# Altium PCB Solar Battery Charger PCB.PcbDoc (part 1 of 2)
Units mm, origin at the board's own origin, x right, y up, seen from the top; angles counter-clockwise.
Board outline 113.77 x 60.65 mm, 4 copper layers (Top Layer, Int1 (GND), Int2 (PWR), Bottom Layer), stack 1.586 mm thick; 88 components, 58 nets, 240 pads, 94 vias.
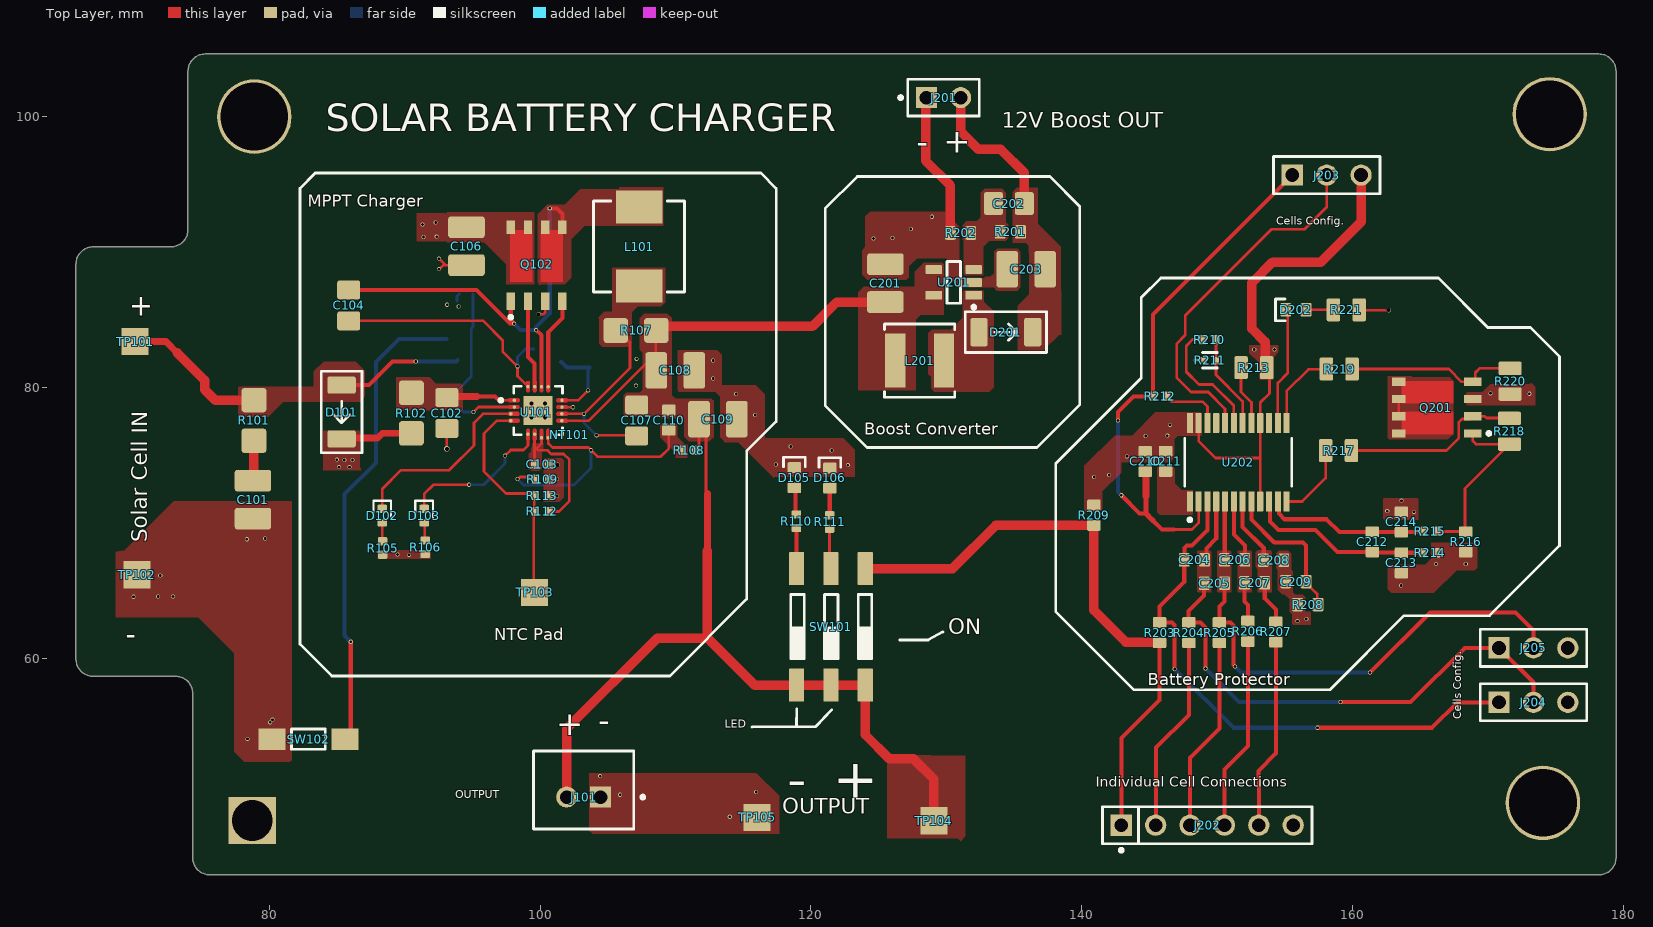
[diagram p0: Top Layer view]
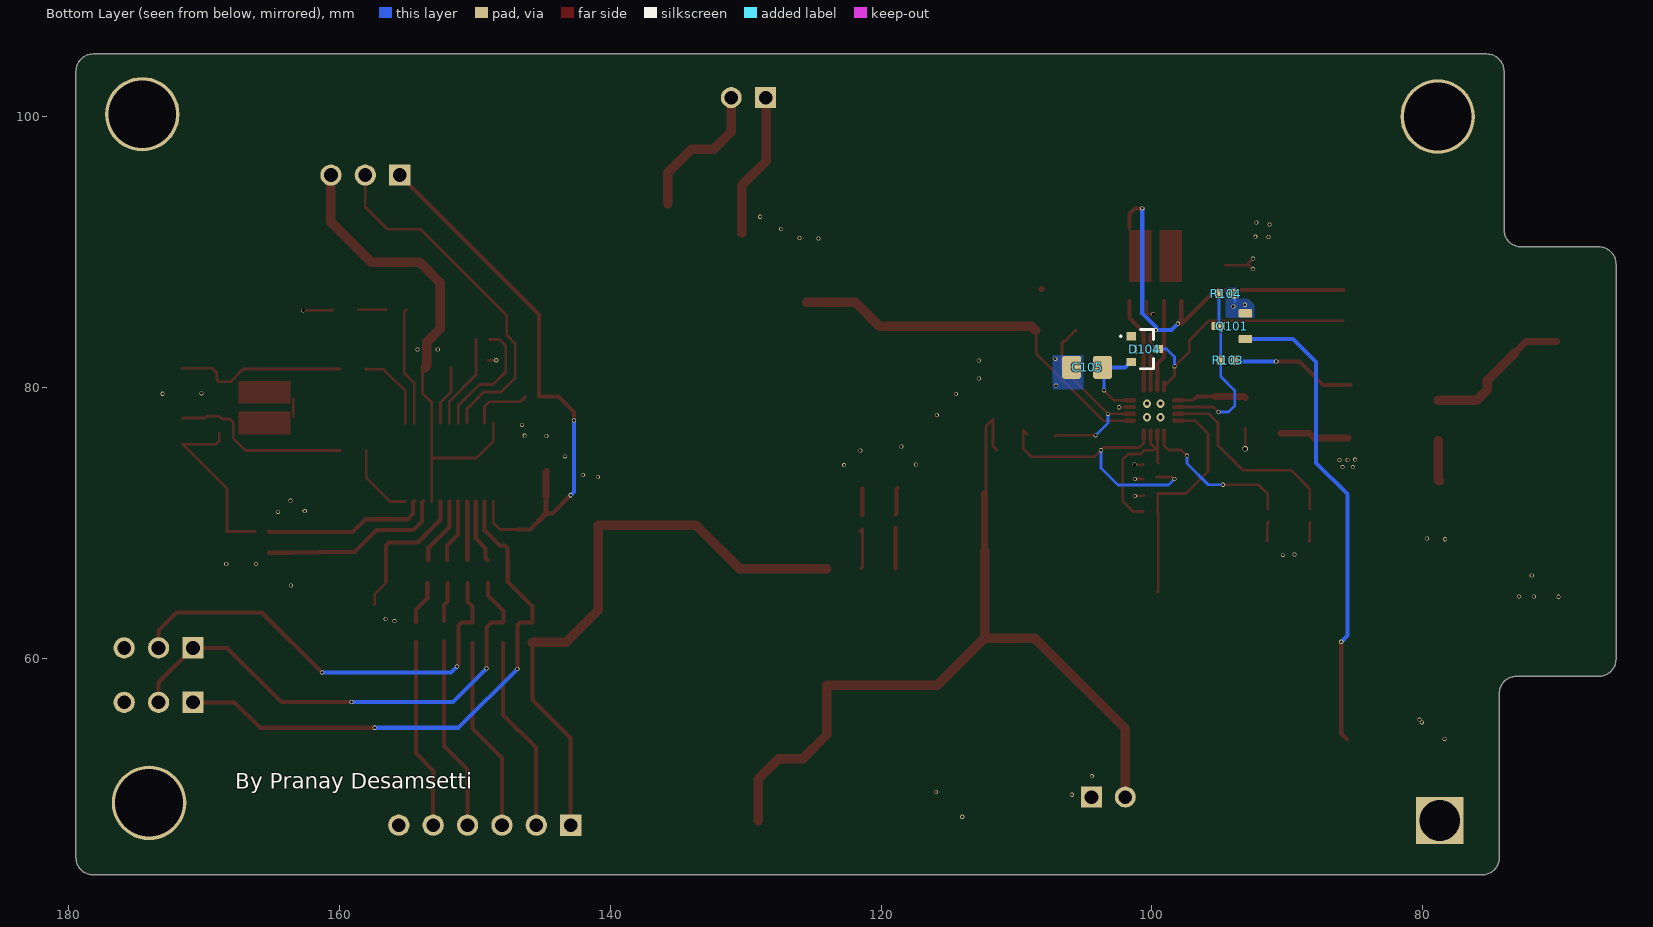
[diagram p1: Bottom Layer view, seen from below]
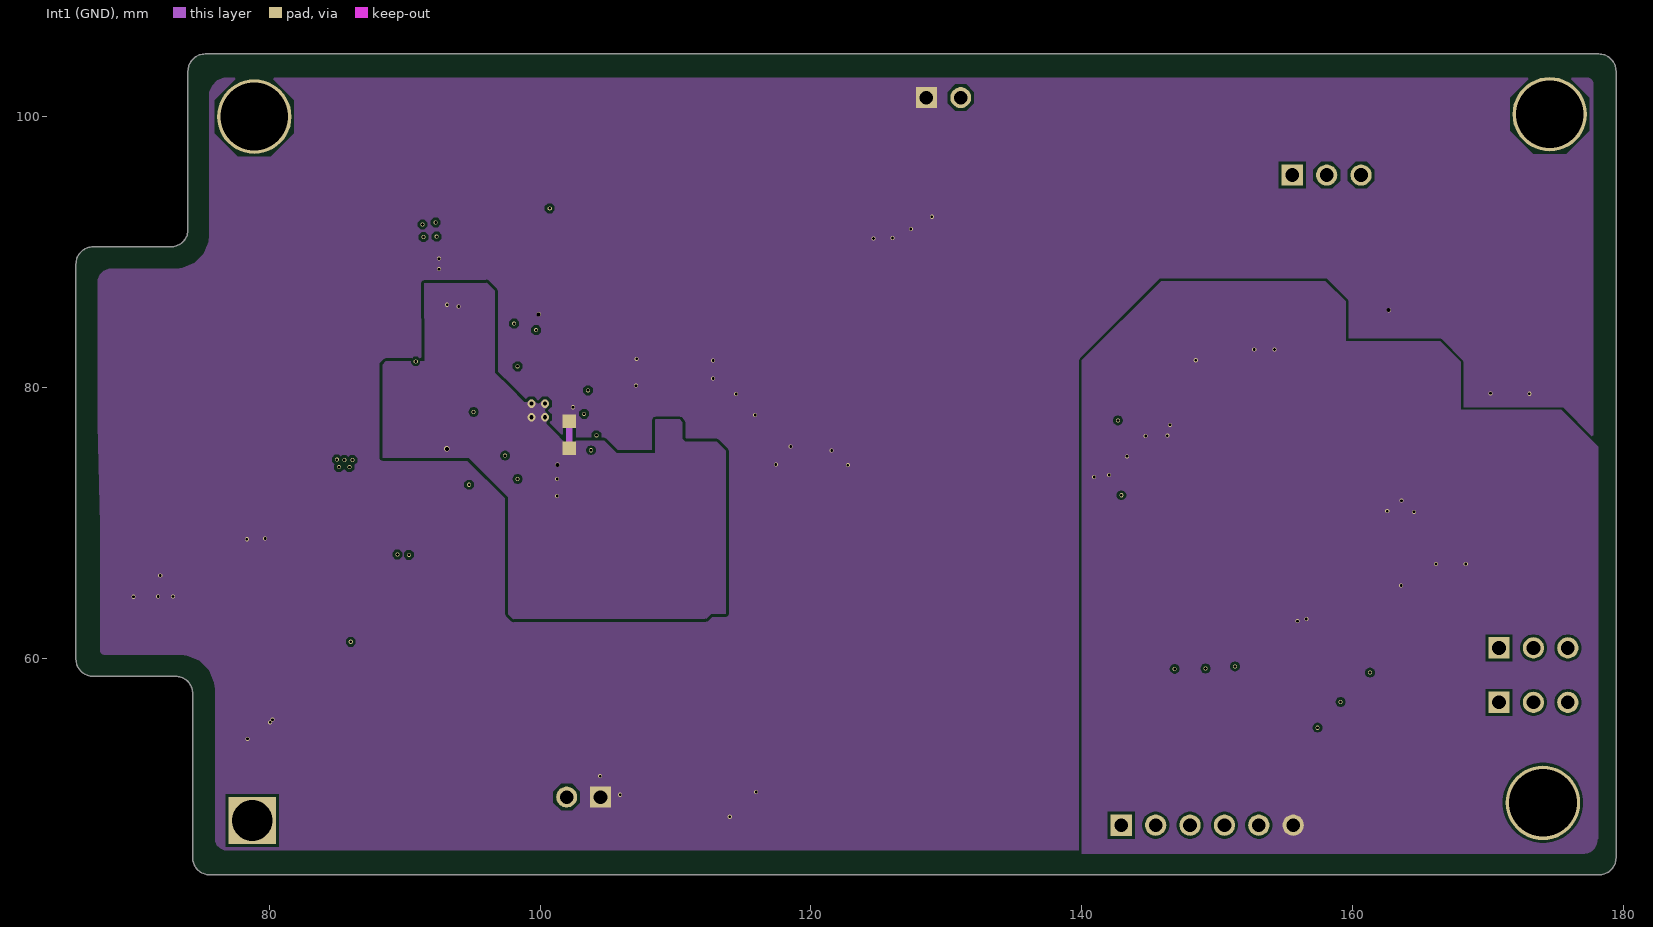
[diagram p2: Int1 (GND)]
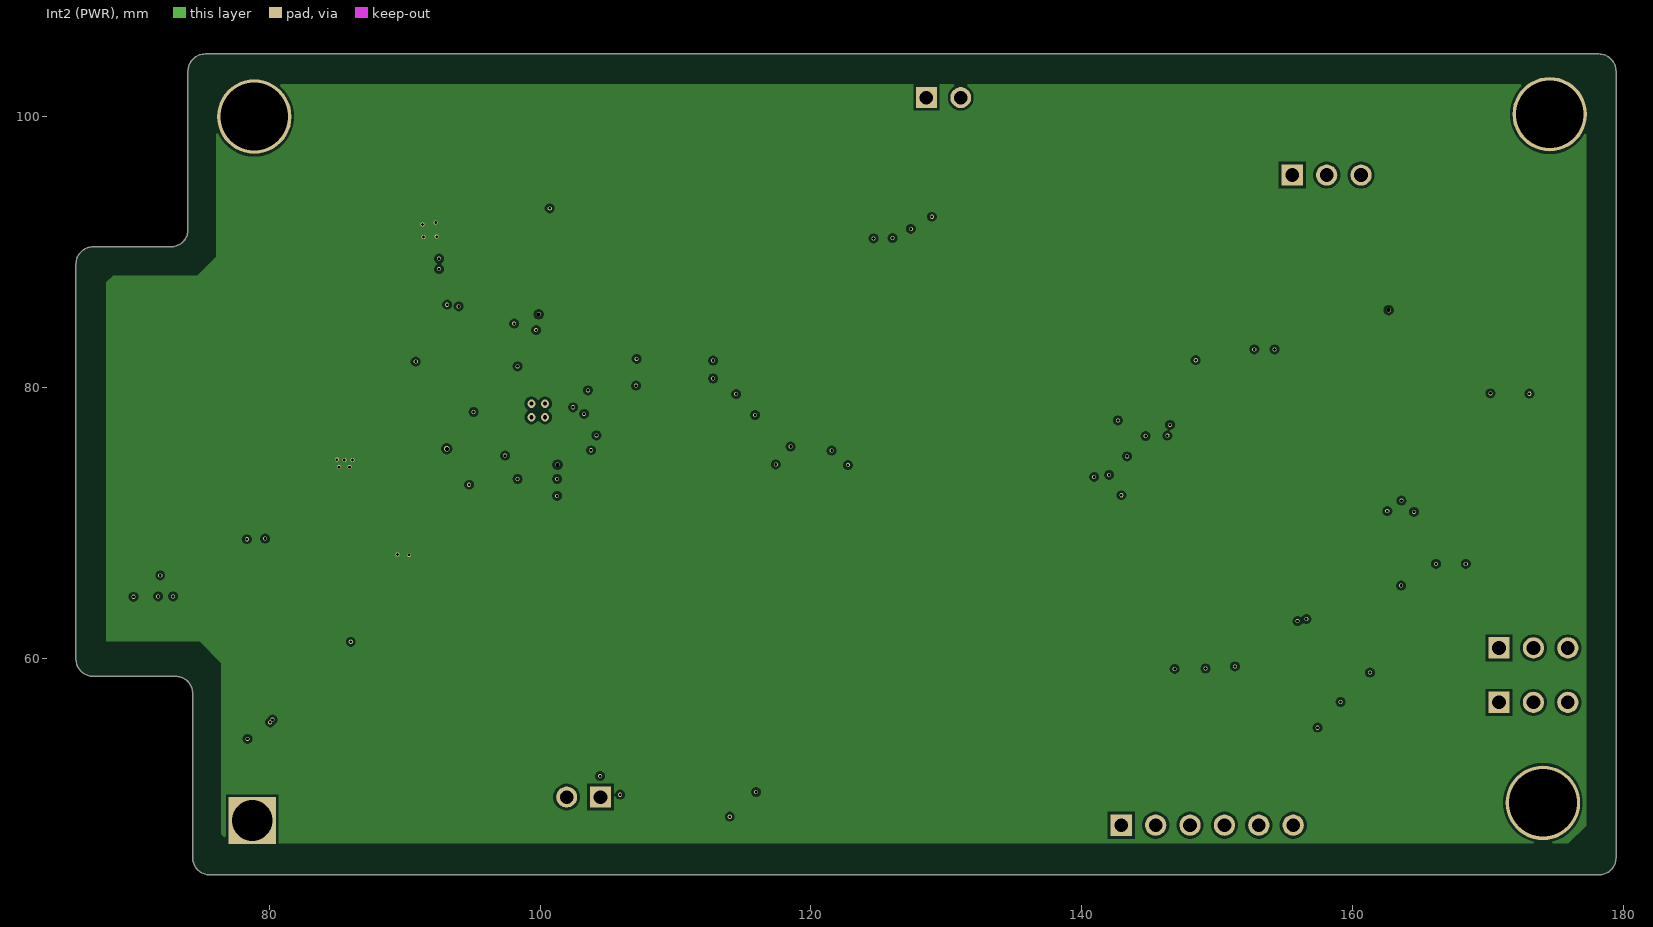
[diagram p3: Int2 (PWR)]
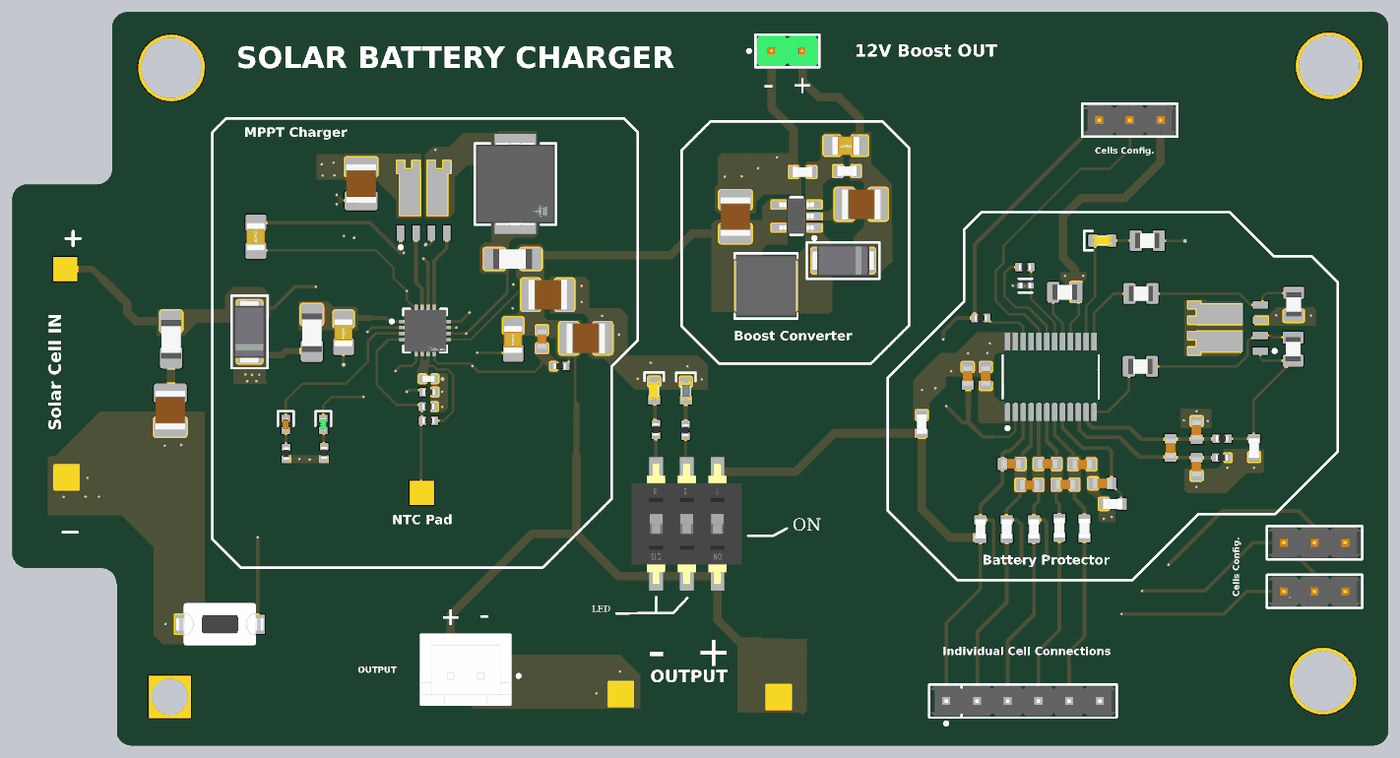
[diagram p4: 3D render of the assembled board from above, using the file's embedded part models]
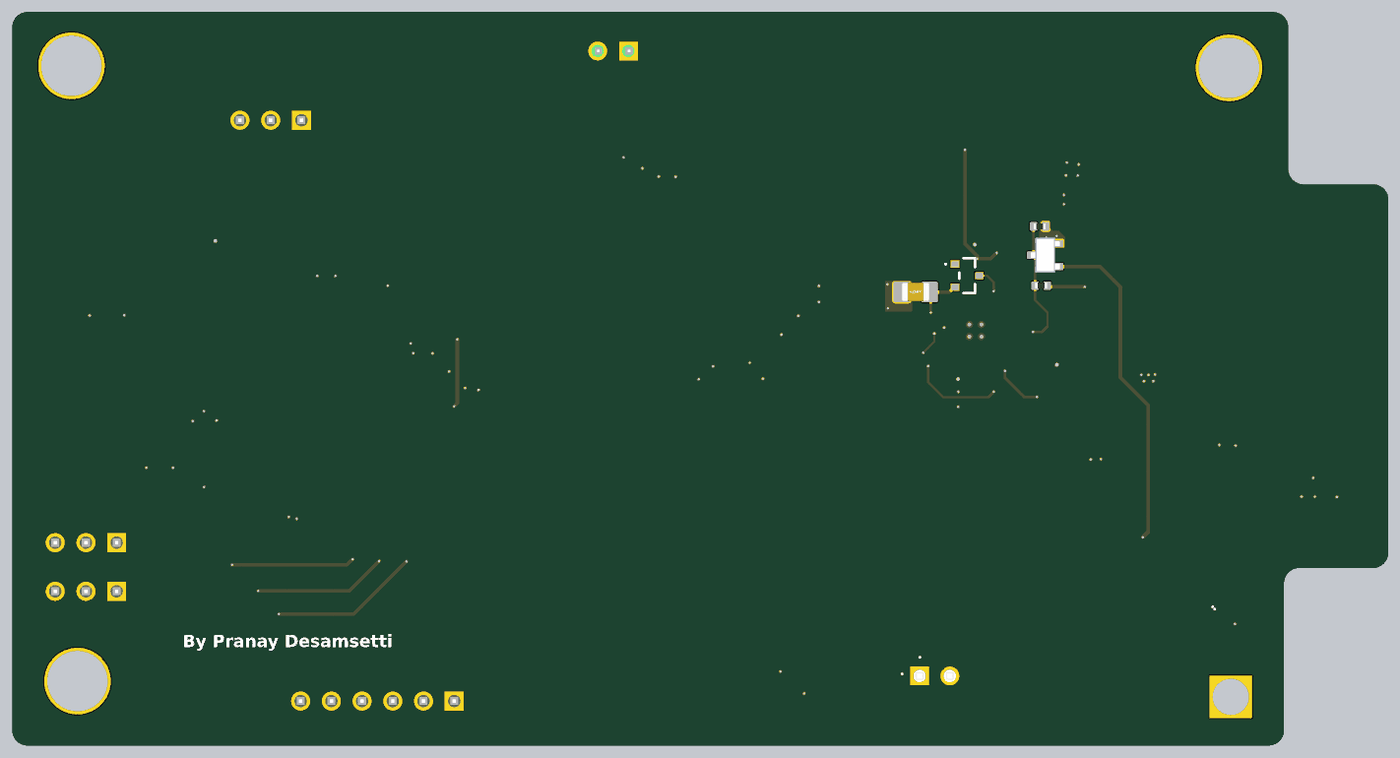
[diagram p5: 3D render of the assembled board from below, using the file's embedded part models]

## Layer stack, top to bottom
Top Solder: solder mask 0.0254, SM-001, Dk 4
Top Layer: signal copper 0.035
Dielectric 2: prepreg 0.2104, PP-017, Dk 4.4
Int1 (GND): signal copper 0.0152
Dielectric 3: core 1.065, Core-039, Dk 4.6
Int2 (PWR): signal copper 0.0152
Dielectric 4: prepreg 0.2104, PP-017, Dk 4.4
Bottom Layer: signal copper 0.035
Bottom Solder: solder mask 0.0254, SM-001, Dk 4

## Board outline
65.7,59.945 ccw(c66.97,59.945) 66.97,58.675 73.055,58.675 cw(c73.055,57.405) 74.325,57.405 74.325,45.27 ccw(c75.595,45.27) 75.595,44 178.205,44 ccw(c178.205,45.27) 179.475,45.27 179.475,103.38 ccw(c178.205,103.38) 178.205,104.65 75.245,104.65 ccw(c75.245,103.38) 73.975,103.38 73.975,91.67 cw(c72.705,91.67) 72.705,90.4 66.97,90.4 ccw(c66.97,89.13) 65.7,89.13

## Design rules (kind name [scope] priority, off if disabled: settings)
Clearance [All] p1: gap=0.2 ignorepadtopadclearanceinfootprint=FALSE except(0: Arc-Hole Track-Hole SMDPad-Hole THPad-Hole Via-Hole Fill-Hole Poly-Hole Region-Hole Text-Hole)
PolygonConnect [All] p1: connectstyle=Direct reliefconductorwidth=0.254 reliefentries=4 polygonreliefangle="90 Angle" airgapwidth=0.254
RoutingVias [All] p1: holewidth=0.25 width=0.35 viastyle="Through Hole" minholewidth=0.2 minwidth=0.3 maxholewidth=0.4 maxwidth=0.6
SolderMaskExpansion SolderMaskExpansion_1 [IsVia] p1: expansion=0.102 istentingtop=TRUE
SolderMaskExpansion [All] p2: expansion=0.102 istentingtop=FALSE
Width [All] p1: maxlimit=0.7 minlimit=0.1 preferedwidth=0.254 toplayer_prefwidth=0.2 midlayer1_minwidth=0.254 midlayer1_maxwidth=0.254 midlayer2_minwidth=0.254 midlayer2_maxwidth=0.254 bottomlayer_prefwidth=0.2 minimp=50.000000 maximp=50.000000 favimp=50.000000
30 further rules are at their usual default settings.

## Classes and differential pairs
component class "Solar Batter Charger SCH_2": C201 C202 C203 C204 C205 C206 C207 C208 C209 C210 C211 C212 C213 C214 D201 D202 J201 J202 J203 J204 J205 L201 Q201 R201 R202 R203 R204 R205 R206 R207 R208 R209 R210 R211 R212 R213 R214 R215 R216 R217 R218 R219 R220 R221 U201 U202
component class "Solar Batter Charger SCH_1": C101 C102 C103 C104 C105 C106 C107 C108 C109 C110 D101 D102 D103 D104 D105 D106 J101 L101 NT101 Q101 Q102 R101 R102 R103 R104 R105 R106 R107 R108 R109 R110 R111 R112 R113 SW101 SW102 TP101 TP102 TP103 TP104 TP105 U101

## Components (designator, comment, footprint, x,y, rotation, side; value= is the part's Value field where it differs from the comment)
C101 "2u2" CAP_1210 78.775,71.725 r90 top
C102 "1u" CAP_0805 93.1,78.125 r90 top
C103 "1u" CAP_0402 100.125,74.325 r180 top
C104 "0.1u" CAP_0805 85.85,86.075 r90 top
C105 "1u" CAP_0805 104.775,81.5 r180 bottom
C106 "10u" CAP_1210 94.55,90.45 r90 top
C107 "0.1u" CAP_0805 107.125,77.575 r90 top
C108 "10u" CAP_1210 109.975,81.275 r180 top
C109 "4.7u" CAP_1210 113.125,77.675 r180 top
C110 "23p" CAP_0603 109.5,77.6 r90 top
C201 "4.7u" CAP_1210 125.5,87.725 r270 top
C202 "6.93p" CAP_0805 134.625,93.6 r180 top
C203 "4.7u" CAP_1210 135.9,88.75 r0 top
C204 "0u1" CAP_0603 148.325,67.275 r0 top
C205 "0u1" CAP_0603 149.8,65.55 r0 top
C206 "0u1" CAP_0603 151.3,67.275 r0 top
C207 "0u1" CAP_0603 152.775,65.575 r0 top
C208 "0u1" CAP_0603 154.175,67.25 r0 top
C209 "0u1" CAP_0603 155.825,65.675 r0 top
C210 "1u" CAP_0603 144.7,74.55 r270 top
C211 "1u" CAP_0603 146.2,74.55 r270 top
C212 "0u1" CAP_0603 161.475,68.6 r90 top
C213 "0u1" CAP_0603 163.625,67.05 r270 top
C214 "0u1" CAP_0603 163.625,70.075 r90 top
D101 "D_SMA" "DO-214AC-2 (SMA)" 85.325,78.2 r270 top
D102 "RED" LED_0402_RED 88.325,70.55 r90 top
D103 "GREEN" LED_0402_GREEN 91.425,70.55 r90 top
D104 "BAT54C" NXP-SOT23-3_V 100.525,82.85 r90 bottom
D105 "YELLOW" LED_0603_YELLOW 118.775,73.35 r270 top
D106 "BLUE" LED_0603_BLUE 121.4,73.325 r270 top
D201 "D_SMA" "DO-214AC-2 (SMA)" 134.4,84.1 r0 top
D202 "YELLOW" LED_0603_YELLOW 155.825,85.75 r0 top
J101 "B2B-XH-A(LF)(SN)" FP-B2B-XH-A_LF_SN-MFG 103.2,50.275 r180 top
J201 "826629-2" FP-826629-2-MFG 129.795,101.425 r0 top
J202 "22-28-4060" FP-22-28-4060-MFG 149.275,47.675 r0 top
J203 "22-28-4035" FP-22-28-4035-MFG 158.1,95.7 r0 top
J204 "22-28-4035" FP-22-28-4035-MFG 173.375,56.75 r0 top
J205 "22-28-4035" FP-22-28-4035-MFG 173.375,60.775 r0 top
L101 "IHLP2525CZER1R0M01" FP-IHLP-2525CZ-FP_2_413x3-MFG 107.3,90.425 r270 top
L201 "10u" NRS5020 128.025,82 r0 top
NT101 "NT" NETTIE_SMD 102.15,76.525 r90 top net-tie
Q101 "2N7002NXAKR" SSM3J338R,LF-SOT23-F 94.075,84.55 r90 bottom
Q102 "SI7288DP-T1-GE3" VISH-POWERPAKSO-8_A_V 99.725,89.05 r90 top
Q201 "SI7288DP-T1-GE3" VISH-POWERPAKSO-8_A_V 166.225,78.525 r180 top
R101 "2R" RES_1206 78.85,77.575 r90 top
R102 "10R" RES_1206 90.475,78.125 r270 top
R103 "499k" RES_0402 94.4,82.025 r180 bottom
R104 "36k" RES_0402 94.525,86.925 r0 bottom
R105 "1K" RES_0402 88.35,68.15 r270 top
R106 "1K" RES_0402 91.5,68.2 r270 top
R107 "20m" RES_1206 107.075,84.225 r0 top
R108 "499k" RES_0402 110.975,75.375 r0 top
R109 "100k" RES_0402 100.15,73.225 r180 top
R110 "1K" RES_0402 118.925,70.125 r270 top
R111 "1K" RES_0402 121.375,70.075 r270 top
R112 "5.23K" RES_0402 100.125,70.85 r0 top
R113 "30.1k" RES_0402 100.1,72.025 r180 top
R201 "R0603" RES_0603 134.725,91.5 r0 top
R202 "R0603" RES_0603 131.05,91.425 r0 top
R203 "1k" RES_0603 145.75,61.9 r90 top
R204 "1k" RES_0603 147.925,61.9 r90 top
R205 "1k" RES_0603 150.175,61.9 r90 top
R206 "1k" RES_0603 152.275,62 r90 top
R207 "1k" RES_0603 154.35,61.95 r90 top
R208 "1k" RES_0603 156.7,63.975 r0 top
R209 "1k" RES_0603 140.9,70.575 r90 top
R210 "10k" RES_0402 149.425,83.55 r0 top
R211 "ERT-J0EG103FA" FP-ERTJ0-MFG 149.475,82.025 r180 top
R212 "500R" RES_0402 145.775,79.35 r180 top
R213 "100k" RES_0805 152.725,81.475 r0 top
R214 "100R" RES_0402 165.7,67.8 r180 top
R215 "100R" RES_0402 165.725,69.375 r180 top
R216 "1mR" RES_0603 168.375,68.6 r270 top
R217 "4k5" RES_0805 158.975,75.35 r180 top
R218 "1M" RES_0805 171.6,76.775 r90 top
R219 "1M" RES_0805 159.025,81.375 r180 top
R220 "3M3" RES_0805 171.65,80.475 r90 top
R221 "450k" RES_0805 159.55,85.75 r180 top
SW101 "219-3LPST" 219-3LPST 121.475,62.325 r180 top
SW102 "DTSM-3" DTSM-3 82.875,54.025 r0 top
TP101 "Pad" PAD_SQ_2MM 70.075,83.4 r180 top
TP102 "Pad" PAD_SQ_2MM 70.2,66.175 r180 top
TP103 "Pad" PAD_SQ_2MM 99.575,64.875 r90 top
TP104 "Pad" PAD_SQ_2MM 129.075,48 r90 top
TP105 "Pad" PAD_SQ_2MM 116.025,48.25 r90 top
U101 "BQ24650RVAT" FP-RVA0016A-MFG 99.839,78.312 r0 top
U201 "TPS61041DBVR" DBV0005A_M 130.55,87.775 r180 top
U202 "BQ7791500PWT" FP-PW0024A-MFG 151.565,74.485 r90 top

## Footprints (in the part's own frame and the unit in brackets; to place one, negate y for a bottom-side part, rotate by r counter-clockwise, add the part's x,y. Pads: shape width x height; smd on the part's side, far side on the other; paste and mask are expansions set on the pad)
219-3LPST [mm]
  rrect10% 1.13x2.44 smd mask+0: 1(-2.54,-4.305) 2(0,-4.305) 3(2.54,-4.305) 4(2.54,4.305) 5(0,4.305) 6(-2.54,4.305)
  silkscreen extent -3.03,-2.39 2.97,2.36, body extent -4.54,-4.95 4.54,4.95, height 4.31
CAP_0402 [mm]
  rrect25% 0.6x0.7 smd: 1(-0.5,0) 2(0.5,0)
  body extent -0.5,-0.26 0.5,0.26, height 0.37
CAP_0603 [mm]
  rrect25% 0.8x1 smd: 1(-0.75,0) 2(0.75,0)
  body extent -0.8,-0.4 0.8,0.4, height 0.51
CAP_0805 [mm]
  rrect25% 1.4x1.7 smd: 1(-1.143,0) 2(1.143,0)
  body extent -1.15,-0.76 1.15,0.79, height 1.01
CAP_1210 [mm]
  rrect25% 1.6x2.7 smd: 1(-1.4,0) 2(1.4,0)
  body extent -1.6,-1.25 1.6,1.25, height 2.5
DBV0005A_M [mm] "SOT23, 5-Leads, Body 3.05x1.75mm, Pitch 0.95mm, IPC Low Density"
  rrect15% 1.2x0.65 smd: 1(-1.475,0.95) 2(-1.475,0) 3(-1.475,-0.95) 4(1.475,-0.95) 5(1.475,0.95)
  silkscreen extent -1.6,-1.55 0.5,1.95, body extent -1.42,-1.46 1.42,1.46, height 1.08
"DO-214AC-2 (SMA)" [mm]
  rrect25% 1.27x2.1 smd: A(-1.985,0) K(1.985,0)
  silkscreen extent -3,-1.5 3,1.5, body extent -2.6,-1.3 2.6,1.3, height 2.42
DTSM-3 [mm]
  rect 2x1.6 smd: 1(-2.7,0) 2(2.7,0)
  silkscreen extent -1.25,-0.75 1.25,0.75, body extent -3.6,-1.75 3.6,1.75, height 4.96
FP-22-28-4035-MFG [mm]
  rect 1.57x1.57 hole 1.02 paste-1000 mask+0: 1(-2.54,0)
  round 1.57 hole 1.02 paste-1000 mask+0: 2(0,0) 3(2.54,0)
  silkscreen extent -3.94,-1.37 3.94,1.37, body extent -4.04,-1.47 4.04,1.47, height 0.25
FP-22-28-4060-MFG [mm]
  rect 1.57x1.57 hole 1.02 paste-1000 mask+0: 1(-6.35,0)
  round 1.57 hole 1.02 paste-1000 mask+0: 2(-3.81,0) 3(-1.27,0) 4(1.27,0) 5(3.81,0) 6(6.35,0)
  silkscreen extent -7.75,-1.97 7.75,1.37, body extent -7.85,-1.47 7.85,1.47, height 0.25
FP-826629-2-MFG [mm]
  rect 1.55x1.55 hole 1 paste-1000 mask+0: 1(-1.27,0)
  round 1.55 hole 1 paste-1000 mask+0: 2(1.27,0)
  silkscreen extent -3.3,-1.35 2.64,1.35, body extent -2.74,-1.45 2.74,1.45, height 0.25
FP-B2B-XH-A_LF_SN-MFG [mm]
  rect 1.55x1.55 hole 1 paste-1000 mask+0: 1(-1.25,0.525)
  round 1.55 hole 1 paste-1000 mask+0: 2(1.25,0.525)
  silkscreen extent -4.5,-2.88 3.7,2.88, body extent -3.8,-2.98 3.8,2.98, height 0.25
FP-ERTJ0-MFG [mm]
  rect 0.45x0.45 smd paste+0 mask+0: 1(-0.45,0) 2(0.45,0)
  silkscreen extent -0.55,-0.57 0.56,0.58, body extent -0.77,-0.38 0.77,0.38, height 0.25
FP-IHLP-2525CZ-FP_2_413x3-MFG [mil]
  rect 95x135 smd paste+0 mask+0: 1(-115,0) 2(115,0)
  silkscreen extent -132,-132 132,132, body extent -166,-136 166,136, height 10
FP-PW0024A-MFG [mm]
  rrect22% 1.5x0.45 smd paste+0 mask+0: 1(-2.9,3.575) 2(-2.9,2.925) 3(-2.9,2.275) 4(-2.9,1.625) 5(-2.9,0.975) 6(-2.9,0.325) 7(-2.9,-0.325) 8(-2.9,-0.975) 9(-2.9,-1.625) 10(-2.9,-2.275) 11(-2.9,-2.925) 12(-2.9,-3.575) 13(2.9,-3.575) 14(2.9,-2.925) 15(2.9,-2.275) 16(2.9,-1.625) 17(2.9,-0.975) 18(2.9,-0.325) 19(2.9,0.325) 20(2.9,0.975) 21(2.9,1.625) 22(2.9,2.275) 23(2.9,2.925) 24(2.9,3.575)
  silkscreen extent -4.37,-3.95 1.78,3.95, body extent -3.75,-4.2 3.75,4.2, height 0.25
FP-RVA0016A-MFG [mm]
  round 0.252 smd paste-1000 mask+0: 1(-1.75,0.75) 2(-1.75,0.25) 3(-2.01,-0.25) 4(-2.01,-0.75) 5(-0.75,-1.75) 6(-0.25,-1.75) 7(0.25,-2.01) 8(0.75,-2.01) 9(1.75,-0.75) 10(1.75,-0.25) 11(1.764,0.25) 12(1.764,0.75) 13(0.75,1.75) 14(0.25,1.75) 15(-0.25,1.764) 16(-0.75,1.764)
  rect 2.14x2.14 smd paste-1000 mask+0: 17(0,0)
  Top Layer region: -0.61,2.15 -0.61,1.49 -0.621,1.436 -0.651,1.391 -0.696,1.361 -0.75,1.35 -0.75,1.35 -0.804,1.361 -0.849,1.391 -0.879,1.436 -0.89,1.49 -0.89,1.49 -0.89,2.15
  Top Layer region: -0.11,2.15 -0.11,1.49 -0.121,1.436 -0.151,1.391 -0.196,1.361 -0.25,1.35 -0.25,1.35 -0.304,1.361 -0.349,1.391 -0.379,1.436 -0.39,1.49 -0.39,1.49 -0.39,2.15
  Top Layer region: 0.39,2.15 0.39,1.49 0.379,1.436 0.349,1.391 0.304,1.361 0.25,1.35 0.25,1.35 0.196,1.361 0.151,1.391 0.121,1.436 0.11,1.49 0.11,1.49 0.11,2.15
  Top Layer region: 0.89,2.15 0.89,1.49 0.879,1.436 0.849,1.391 0.804,1.361 0.75,1.35 0.75,1.35 0.696,1.361 0.651,1.391 0.621,1.436 0.61,1.49 0.61,1.49 0.61,2.15
  Top Layer region: 0.61,-2.15 0.61,-1.49 0.621,-1.436 0.651,-1.391 0.696,-1.361 0.75,-1.35 0.75,-1.35 0.804,-1.361 0.849,-1.391 0.879,-1.436 0.89,-1.49 0.89,-1.49 0.89,-2.15
  Top Layer region: 0.11,-2.15 0.11,-1.49 0.121,-1.436 0.151,-1.391 0.196,-1.361 0.25,-1.35 0.25,-1.35 0.304,-1.361 0.349,-1.391 0.379,-1.436 0.39,-1.49 0.39,-1.49 0.39,-2.15
  Top Layer region: -0.39,-2.15 -0.39,-1.49 -0.379,-1.436 -0.349,-1.391 -0.304,-1.361 -0.25,-1.35 -0.25,-1.35 -0.196,-1.361 -0.151,-1.391 -0.121,-1.436 -0.11,-1.49 -0.11,-1.49 -0.11,-2.15
  Top Layer region: -0.89,-2.15 -0.89,-1.49 -0.879,-1.436 -0.849,-1.391 -0.804,-1.361 -0.75,-1.35 -0.75,-1.35 -0.696,-1.361 -0.651,-1.391 -0.621,-1.436 -0.61,-1.49 -0.61,-1.49 -0.61,-2.15
  Top Layer region: 2.15,0.61 1.49,0.61 1.436,0.621 1.391,0.651 1.361,0.696 1.35,0.75 1.35,0.75 1.361,0.804 1.391,0.849 1.436,0.879 1.49,0.89 1.49,0.89 2.15,0.89
  Top Layer region: 2.15,0.11 1.49,0.11 1.436,0.121 1.391,0.151 1.361,0.196 1.35,0.25 1.35,0.25 1.361,0.304 1.391,0.349 1.436,0.379 1.49,0.39 1.49,0.39 2.15,0.39
  Top Layer region: 2.15,-0.39 1.49,-0.39 1.436,-0.379 1.391,-0.349 1.361,-0.304 1.35,-0.25 1.35,-0.25 1.361,-0.196 1.391,-0.151 1.436,-0.121 1.49,-0.11 1.49,-0.11 2.15,-0.11
  Top Layer region: 2.15,-0.89 1.49,-0.89 1.436,-0.879 1.391,-0.849 1.361,-0.804 1.35,-0.75 1.35,-0.75 1.361,-0.696 1.391,-0.651 1.436,-0.621 1.49,-0.61 1.49,-0.61 2.15,-0.61
  Top Layer region: -2.15,-0.61 -1.49,-0.61 -1.436,-0.621 -1.391,-0.651 -1.361,-0.696 -1.35,-0.75 -1.35,-0.75 -1.361,-0.804 -1.391,-0.849 -1.436,-0.879 -1.49,-0.89 -1.49,-0.89 -2.15,-0.89
  Top Layer region: -2.15,-0.11 -1.49,-0.11 -1.436,-0.121 -1.391,-0.151 -1.361,-0.196 -1.35,-0.25 -1.35,-0.25 -1.361,-0.304 -1.391,-0.349 -1.436,-0.379 -1.49,-0.39 -1.49,-0.39 -2.15,-0.39
  Top Layer region: -2.15,0.39 -1.49,0.39 -1.436,0.379 -1.391,0.349 -1.361,0.304 -1.35,0.25 -1.35,0.25 -1.361,0.196 -1.391,0.151 -1.436,0.121 -1.49,0.11 -1.49,0.11 -2.15,0.11
  Top Layer region: -2.15,0.89 -1.49,0.89 -1.436,0.879 -1.391,0.849 -1.361,0.804 -1.35,0.75 -1.35,0.75 -1.361,0.696 -1.391,0.651 -1.436,0.621 -1.49,0.61 -1.49,0.61 -2.15,0.61
  silkscreen extent -2.87,-1.8 1.8,1.8, body extent -2.25,-2.25 2.25,2.25, height 0.25
LED_0402_GREEN [mm]
  rrect25% 0.6x0.7 smd: A(-0.5,0) K(0.5,0)
  silkscreen extent -0.15,-0.65 1.1,0.65, body extent -0.51,-0.25 0.51,0.25, height 0.45
LED_0402_RED [mm]
  rrect25% 0.6x0.7 smd: A(-0.5,0) K(0.5,0)
  silkscreen extent -0.15,-0.65 1.1,0.65, body extent -0.51,-0.25 0.51,0.25, height 0.45
LED_0603_BLUE [mm]
  rrect25% 0.8x1 smd: A(0.75,0) K(-0.75,0)
  silkscreen extent -1.5,-0.8 -0.8,0.8, body extent -0.8,-0.4 0.8,0.4, height 0.6
LED_0603_YELLOW [mm]
  rrect25% 0.8x1 smd: A(0.75,0) K(-0.75,0)
  silkscreen extent -1.5,-0.8 -0.8,0.8, body extent -0.8,-0.4 0.8,0.4, height 0.6
NETTIE_SMD [mm]
  rect 1x1 on Mid1 mask-10: 1(-1,0) 2(1,0)
  Int1 (GND) region: -0.748,-0.25 0.752,-0.25 0.752,0.25 -0.748,0.25
NRS5020 [mm]
  rect 1.5x4 smd: 1(-1.8,0) 2(1.8,0)
  silkscreen extent -2.6,-2.7 2.6,2.7, body extent -2.45,-2.45 2.45,2.45, height 2.1
NXP-SOT23-3_V [mm] "SOT23, 3-Leads, Body 1.3x2.9mm, Pitch 0.95mm"
  rect 0.6x0.7 smd paste-0.05: 1(0.95,1) 2(-0.95,1) 3(0,-1)
  silkscreen extent -1.45,-0.65 1.45,1.79, body extent -1.45,-0.65 1.45,0.65, height 1.1
PAD_SQ_2MM [mm]
  rect 2x2 smd paste-1: 1(0,0)
RES_0402 [mm]
  rrect25% 0.6x0.7 smd: 1(-0.5,0) 2(0.5,0)
  body extent -0.5,-0.25 0.5,0.25, height 0.3
RES_0603 [mm]
  rrect25% 0.8x1 smd: 1(-0.75,0) 2(0.75,0)
  body extent -0.8,-0.43 0.8,0.43, height 0.52
RES_0805 [mm]
  rrect25% 1x1.7 smd: 1(-0.95,0) 2(0.95,0)
  body extent -1,-0.63 1,0.63, height 0.47
RES_1206 [mm]
  rrect25% 1.8x1.84 smd: 1(-1.5,0) 2(1.5,0)
  body extent -1.6,-0.83 1.6,0.83, height 0.57
SSM3J338R,LF-SOT23-F [mm]
  rrect25% 0.6x1 smd: D(0,1) G(-0.95,-1) S(0.95,-1)
  body extent -1.45,-1.2 1.45,1.2, height 0.91
VISH-POWERPAKSO-8_A_V [mm] "SMD, 8-Leads, Body 6.15x5.155mm, Pitch 1.27mm"
  rect 1.27x0.61 smd: 1(-2.67,1.905) 2(-2.67,0.635) 3(-2.67,-0.635) 4(-2.67,-1.905)
  rect 1.02x0.61 smd: 5(2.795,-1.905) 6(2.795,-0.635) 7(2.795,0.635) 8(2.795,1.905)
  Top Layer region: -1.215,-1.955 2.595,-1.955 2.595,-0.305 -1.215,-0.305
  Top Layer region: -1.215,0.305 2.595,0.305 2.595,1.955 -1.215,1.955
  silkscreen extent -3.98,1.78 -3.73,2.03, body extent -3.08,-2.58 3.08,2.58, height 1.12

## Part data
C101 C106 C108 C109 C201 C203: library part CAP_1210, "Capacitor SMD 1210"
C102 C104 C105 C107 C202: library part CAP_0805, "Capacitor SMD 0805"
C103: library part CAP_0402, "Capacitor SMD 0402"
C110 C204 C205 C206 C207 C208 C209 C210 C211 C212 C213 C214: library part CAP_0603, "Capacitor SMD 0603"
D101 D201: "Diode SMD SMA (DO-214AA)"
D102: library part LED_0402_RED, "LED 0402 RED SMD"
D103: library part LED_0402_GREEN, "LED 0402 GREEN SMD"
D104: library part CMP-0417-00003-1, "Schottky Barrier Diode, 30 V, 2 uA, -55 to 150 degC, 3-Pin SOT23, RoHS, Tape and Reel", Manufacturer="NXP Semiconductors", Temperature Range="-55 to 150 degC", Cd (pF)=10, ComponentLink1Description="Manufacturer URL", ComponentLink1URL=http://www.nxp.com/, ComponentLink2Description=Datasheet, ComponentLink2URL=http://www.nxp.com/documents/data_sheet/BAT54_SER.pdf, DatasheetVersion="Rev. 5", IR (uA)=2, Mounting Technology="Surface Mount", PackageDescription="3-Pin Plastic Surface-mounted Package, Body 1.3 x 2.9 mm, Pitch 0.95 mm", PackageReference=SOT23-3, Packing="Tape and Reel", PartNumber=BAT54C, RoHS=TRUE, Rth(j-a) (K/W)=500, Trr (ns)=5, VF (mV)=800, VR (V)=30
D105 D202: library part LED_0603_YELLOW, "LED 0603 YELLOW SMD"
D106: library part LED_0603_BLUE, "LED 0603 BLUE SMD"
J101: library part CMP-2000-05888-3, "CONN HEADER VERT 2POS 2.5MM", Color=Natural, Contact Resistance=20mR, Current Rating=3A, Housing Color=White, Insulation Resistance=1GR, Max Operating Temperature=85°C, Max Voltage Rating (AC)=250V, Min Operating Temperature=-25°C, Connector Type="Male Pin", Contact Material=Brass, Contact Plating=Tin, Contact Type="Male Pin", Depth=5.75mm, Fastening Type=Detent, Housing Material=Polyamide, Lead Free="Lead Free", Lead Pitch=2.5mm, Length=7.4mm, Max Current Rating=3A, Max Voltage Rating (DC)=250V, Mount="Through Hole", Number Of Contacts=2, Number of Positions=2, Number of Rows=1, Orientation=Straight, Packaging=Bulk, Pitch=2.5mm, REACH SVHC="No SVHC", Series=XH, Termination=Solder, Voltage Rating=250V, Voltage Rating (AC)=250V, Wire/Cable Gauge=22AWG
J201: library part CMP-05178-000003-1, "CONN HEADER VERT 2POS 2.54MM", RoHS Compliant=Yes
J202: library part CMP-04776-000763-1, "CONN HEADER VERT 6POS 2.54MM", Color=Black, Contact Resistance=20mR, Current Rating=4A, Max Operating Temperature=75°C, Max Voltage Rating (AC)=250V, Max Voltage Rating (DC)=250.25kV, Min Operating Temperature=0°C, Package Quantity=1, Connector Type="Male Pin", Contact Material=Brass, Contact Mating Length=0.24inch, Contact Plating=Tin, Contact Type="Male Pin", Depth=2.49mm, Gender=Male, Housing Color=Black, Housing Material=Thermoplastic, Length=15.24mm, Mount="Through Hole", Number Of Contacts=6, Number of Positions=6, Number of Rows=1, Orientation=Straight, Packaging=Bulk, Pitch=2.54mm, RoHS Compliant=Yes, Series="KK® 42375", Termination=Solder, Voltage Rating=250V
J203 J204 J205: library part CMP-00257-00247547-1, "22-28-4035 BOARD-BOARD Connector HEADER, 3WAY, 1ROW; Series: KK; Pitch Spacing: 2.54mm; No. of Rows: 1;", Color=Black, Contact Resistance=20mΩ, Current Rating=4A, Manufacturer Lifecycle Status=ACTIVE, Max Operating Temperature=75°C, Max Voltage Rating (DC)=250.25kV, Min Operating Temperature=0°C, Voltage Rating=250V, Connector Type="Male Pin", Contact Material=Brass, Contact Mating Length=7.493mm, Contact Plating=Gold, Country of Origin=US, Gender=Male, Glow Wire Compliant=Non-compliant, Housing Color=Black, Housing Material=Thermoplastic, Lead Free="Lead Free", Lifecycle Status=Production, Mount="Through Hole", NexarPartId=247547, Number of Circuits=3, Number Of Contacts=3, Number of Positions=3, Number of Rows=1, Orientation=Vertical, Packaging=Bulk, Pitch=2.54mm, Plating=Tin, REACH SVHC=Unknown, RoHS=Compliant, Schedule B=8536694040, Termination="Through Hole"
L101: library part CMP-02424-000599-1, "Commercial Inductors, High Saturation Series 1uH 11A 10mΩ 20%", Case/Package=2525, Current Rating=11A, DC Resistance (DCR)=10mR, Inductance=1uH, Inductance Tolerance=20%, Max Operating Temperature=125°C, Min Operating Temperature=-55°C, Package Quantity=2000, Saturation Current=22A, Self Resonant Frequency=5MHz, Test Frequency=100kHz, Contact Plating=Tin, Core Material=Metal, Depth=6.72mm, Height=3mm, Lead Free="Lead Free", Length=7.24mm, Max DC Current=11A, Military Standard=Not, Mount="Surface Mount", Number of Pins=2, Packaging="Tape and Reel", Radiation Hardening=No, RMS Current (Irms)=11A, Shielding=Shielded, Termination=SMD/SMT, Tolerance=20%, Width=6.47mm
L201: library part NRS5020, "NRS5020 SMD Power Inductor Taiyo Yuden", Manufacturer="Taiyo Yuden", Manufacturer Part Number=NRS5020
NT101: library part NetTie_SMD, "Net Tie SMD"
Q101: "MOSFET N-Channel Vds=60V Id=300mA with ESD Protection", Manufacturer=Nexperia, Manufacturer Part Number=2N7002NXAKR
Q102 Q201: library part CMP-2000-07062-1, "Dual N-Channel (D-S) MOSFET, 40 V, 20 A, -55 to 150 degC, 8-Pin POWERPAKSO-8, RoHS, Tape and Reel", Current - Continuous Drain (Id) @ 25°C=20A, Drain to Source Voltage (Vdss)=40V, Input Capacitance (Ciss) @ Vds=565pF@20V, Manufacturer=Vishay, Package / Case=PowerPAK®SO-8Dual, Package Description="8-Pin Surface Mount Device, Body 6.15 x 5.155 mm, Pitch 1.27 mm", Package Reference=POWERPAKSO-8, Power - Max=15.6W, Standard Package=1, Category=DiscreteSemiconductorProducts, Datasheet URL=http://www.vishay.com/docs/65366/si7288dp.pdf, Datasheet Version="Rev. A, 10/2009", Family=FETs-Arrays, FET Feature=Standard, FET Type=2N-Channel(Dual), Gate Charge (Qg) @ Vgs=15nC@10V, Manufacturer URL=http://www.vishay.com/, Mounting Technology=SurfaceMount, Mounting Type=SurfaceMount, Online Catalog=N-ChannelStandardFETs, Other Names=SI7288DP-T1-GE3DKR, Packaging=Digi-Reel®, PCN Assembly/Origin=MultipleFabracationChanges09/Jul/2014, Rds On (Max) @ Id, Vgs=19mOhm@10A,10V, Series=TrenchFET®, Supplier Device Package=PowerPAK®SO-8Dual, Vgs(th) (Max) @ Id=2.8V@250µA
R101 R102 R107: library part RES_1206, "Resistor SMD 1206"
R103 R104 R105 R106 R108 R109 R110 R111 R112 R113 R210 R212 R214 R215: library part RES_0402, "Resistor SMD 0402"
R201 R202 R203 R204 R205 R206 R207 R208 R209 R216: library part RES_0603, "Resistor SMD 0603"
R211: library part CMP-2002-01179-2, "THERMISTOR NTC 10KOHM 3380K 0402", Case Code (Imperial)=0402, Case Code (Metric)=1005, Max Operating Temperature=125°C, Max Power Dissipation=66mW, Min Operating Temperature=-40°C, Package Quantity=1, Resistance=10kR, Resistance Tolerance=1%, Accuracy=1%, Case/Package=0402, Contact Plating=Tin, Depth=0.5mm, Height=0.5mm, Lead Free="Lead Free", Length=1mm, Mount="Surface Mount", Number of Pins=2, Packaging="Tape and Reel", Power Rating=66mW, Radiation Hardening=No, REACH SVHC="No SVHC", RoHS Compliant=Yes, Series=ERT-J, Termination=SMD/SMT, Tolerance=1%, Width=500um
R213 R217 R218 R219 R220 R221: library part RES_0805, "Resistor SMD 0805"
SW101: "DIP Switches SPST 3x", Manufacturer=CTS, Manufacturer Part Number=219-3LPST
SW102: "Tactile Switch SMD SPST", Manufacturer=Diptronics, Manufacturer Part Number=DTSM-3
TP101 TP102 TP103 TP104 TP105: library part PAD_SQ_2MM, "Test Point Square 2mm"
U101: library part CMP-0321-00203-3, "IC SYNC SW-MODE BAT CHRGR 16VQFN", Case/Package=VQFN, Max Charge Current=10A, Max Operating Temperature=125°C, Max Output Voltage=2.1V, Max Supply Voltage=28V, Min Input Voltage=5V, Min Operating Temperature=-40°C, Operating Supply Current=25mA, Output Voltage=26V, Package Quantity=1, Switching Frequency=600kHz, Contact Plating=Gold, Height=0.95mm, Lead Free="Lead Free", Length=3.6mm, Min Supply Voltage=5V, Number of Cells=123456, Number of Pins=16, Output Current=10A, Packaging="Tape and Reel", Radiation Hardening=No, REACH SVHC="No SVHC", RoHS Compliant=Yes, Weight=0.001764oz, Width=3.6mm
U201: library part CMP-0388-00116-2, "28 V, 250 mA Switch Boost Converter for LCD and White LED Applications, 1.8 to 6 V, -40 to 85 degC, 5-pin SOT23 (DBV5), Green (RoHS & no Sb/Br)", Manufacturer="Texas Instruments", Rating=Catalog, Switching Frequency(Max)(kHz)=1000, Code_JEDEC=MO-178, ComponentLink1Description="Manufacturer URL", ComponentLink1URL=http://www.ti.com/, ComponentLink2Description=Datasheet, ComponentLink2URL=http://www.ti.com/general/docs/lit/getliterature.tsp?genericPartNumber=TPS61041&fileType=pdf, ComponentLink3Description="Package Specification", ComponentLink3URL=http://www.ti.com/litv/pdf/mpds018i, DatasheetVersion=SLVS413F, Dimming=TRUE, Eco-Plan="Green (RoHS & no Sb/Br)", Iout(Max)(A)=0.05, Iq(Typ)(mA)=0.028, Mounting Technology="Surface Mount", PackageDescription="5-Pin Plastic Small Outline, Body 1.60 Ãƒâ€” 2.90 mm, Pitch 0.95 mm", PackageReference=DBV0005A, PackageVersion=4073253-4/K, PartNumber=TPS61041DBVR, SubFamily="White LED Driver", Topology=Boost, Vin(Max)(V)=6, Vin(Min)(V)=1.8
U202: library part CMP-04911-000012-1, "3-SERIES TO 5-SERIES STACKABLE U", Manufacturer="Texas Instruments", Max Supply Voltage=25V, Min Supply Voltage=3V, Nominal Supply Current=8-48uA, Output Current=50mA, Output Voltage=0-25V, Package=PW0024A, Temperature="-40°C to +85°C", Temperature Range High=+85°C, Temperature Range Low=-40°C, Automotive=No, Category=IC, ComponentLink2Description=Datasheet, ComponentLink2URL=http://www.ti.com/lit/ds/symlink/bq77915.pdf, Device Class L1="Integrated Circuits (ICs)", Device Class L2="Power Management ICs", Device Class L3="Battery Management", Digikey Description="3-SERIES TO 5-SERIES STACKABLE U", Height=1.2mm, Lead Free=Yes, Manufacturer Part Number=BQ7791500PWT, Number of Cells=5, Octopart=https://octopart.com/bq7791500pwt-texas+instruments-90752675, RoHS=TRUE, Standoff Height=0.05mm

## Free pads (board coordinates)
  round 5.5 hole 5: 2(78.875,100.025) 2(174.075,49.325) 2(174.575,100.2)
  rect 3.5x3.5 hole 3: 3(78.725,48.025)

## Via types
v1: diameter 0.3, hole 0.2, Top Layer to Bottom Layer, tented both sides, 86 vias
v2: diameter 0.6, hole 0.3, Top Layer to Bottom Layer, 4 vias
v3: diameter 0.35, hole 0.3, Top Layer to Bottom Layer, tented both sides, 3 vias
v4: diameter 0.4, hole 0.3, Top Layer to Bottom Layer, tented both sides, 1 vias

## Nets (pads, with @x,y where several pads share a name; then routed paths per layer and width w, separated by ;. In a path a pad name is that pad's centre, name@x,y a point inside that pad or via, vN(x,y) a via of type N, cw(c..) or ccw(c..) an arc to the next point about the centre after c; other vN are vias at no path point)
AGND: C102.1 C103.1 NT101.1 Q101.S R104.1 R109.1 R113.1 U101.17 | length 4
  Top Layer w0.2: v4(93.1,75.475) C102.1 ; R113.1 100.612,72.013 101.238,72.013 v1(101.25,72) ; C103.1 100.637,74.313 101.263,74.313 v3(101.275,74.3) ; R109.1 100.675,73.25 v1(101.25,73.25)
  Bottom Layer w0.2: 93.85,86.4 93.85,86.75 R104.1
  other v1: 93.975,86 93.125,86.125
  other v2: 99.339,77.812 100.339,77.812 99.339,78.812 100.339,78.812
B_FB: C202.2 R201.1 R202.2 U201.3
B_OUT: C202.1 C203.2 D201.K J201.2 R201.2 | length 10.7
  Top Layer w0.7: J201.2 131.065,98.91 132.375,97.6 134.025,97.6 135.768,95.857 C202.1
B_SW: D201.A L201.2 U201.1
CELL_2: J202.2 R204.1 | length 14.5
  Top Layer w0.3: J202.2 145.5,47.71 145.5,53.4 147.925,55.825 R204.1
CELL_3: J202.3 R205.1 | length 14.4
  Top Layer w0.3: J202.3 148.005,52.655 150.175,54.825 R205.1
CELL_4: J202.4 R206.1 | length 14.3
  Top Layer w0.3: J202.4 150.545,49.22 150.55,49.225 150.55,51.804 152.275,53.529 R206.1
CELL_5: J202.5 R207.1 | length 14.1
  Top Layer w0.3: J202.5 153.085,50.965 153.05,51 153.05,51.69 154.35,52.99 R207.1
F1: R110.2 SW101.3 | length 3
  Top Layer w0.3: R110.2 118.925,66.64 SW101.3
F1_1: D105.A R110.1 | length 2
  Top Layer w0.3: D105.A 118.85,72.525 118.85,70.7 R110.1
F2: R111.2 SW101.2 | length 3.3
  Top Layer w0.2: SW101.2 121.375,66.73 R111.2 R111.2@121.575,69.375
F2_1: D106.A R111.1 | length 2
  Top Layer w0.2: D106.A@121.375,72.55 D106.A
  Top Layer w0.3: R111.1 121.388,70.587 121.388,72.538 D106.A@121.375,72.55
GND: C101.1 C105.1 C106.1 C108.1 C109.1 C201.1 C203.1 D105.K D106.K J101.1 J201.1 NT101.2 Q102.3 Q201.3 R202.1 R220.1 R221.1 SW102.1 TP102.1 TP105.1 U101.11 U201.2 | length 18
  Top Layer w0.2: v1(92.525,88.75) 92.552,88.75 92.852,89.05 93,89.05 ; v1(92.525,89.525) 93,89.05 ; C106.1 93,89.05 ; v3(99.882,85.418) 100.243,85.418 100.36,85.535 Q102.3 ; U101.11 101.609,78.556 102.419,78.556 v1(102.425,78.55) ; J201.1@128.475,101.075 128.525,101.125 J201.1 ; R221.1 160.525,85.725 v3(162.675,85.725)
  Top Layer w0.7: J201.1@128.475,101.075 128.475,96.75 130.3,94.925 R202.1
  other v1: 114,48.3 105.9,49.925 115.95,50.125 104.425,51.3 78.375,54.05 80.05,55.275 80.225,55.475 69.95,64.55 71.775,64.575 72.875,64.575 71.925,66.125 78.325,68.8 79.675,68.85 122.725,74.275 117.4,74.325 121.525,75.35 118.5,75.65 115.875,77.975 114.475,79.525 173.075,79.55 170.2,79.575 107.075,80.15 112.775,80.675 112.775,82 107.125,82.125 124.625,91.025 126.025,91.05 127.375,91.725 128.925,92.625
MPPSET_PD: Q101.G SW102.2 | length 35.1
  Top Layer w0.3: SW102.2 86,54.45 v1(86,61.225)
  Bottom Layer w0.3: v1(86,61.225) 85.55,61.675 85.55,72.125 87.85,74.425 87.85,81.9 89.55,83.6 Q101.G
NetD102_A: D102.A R105.1 | length 1.5
  Top Layer w0.2: D102.A 88.3,70.025 88.338,69.988 88.338,68.662 R105.1 R105.1@88.375,68.675
NetD103_A: D103.A R106.1 | length 1.5
  Top Layer w0.2: D103.A@91.35,70.075 D103.A@91.375,70.05 ; D103.A D103.A@91.375,70.05 ; R106.1 91.463,68.737 91.463,69.962 D103.A@91.375,70.05
NetD202_A: D202.A R221.2 | length 2
  Top Layer w0.2: D202.A R221.2
NetQ201_1: Q201.1 R215.1 R216.1 R218.1 | length 13.3
  Top Layer w0.2: R215.1 R216.1@168.35,69.375 ; R216.1 R216.1@168.35,69.375 ; Q201.1 168.895,76.055 169.125,75.825 R218.1 168.325,72.55 168.325,69.4 R216.1@168.35,69.375
NetQ201_2: Q201.2 R217.1 R218.2 | length 13.5
  Top Layer w0.2: R217.1 166.95,75.35 167.85,76.25 167.85,77.425 168.11,77.685 168.69,77.685 Q201.2 169.76,77.89 169.9,77.75 171.575,77.75 R218.2
NetQ201_4: Q201.4 R219.1 R220.2 | length 12.8
  Top Layer w0.2: R219.1 167.125,81.375 168.07,80.43 Q201.4 169.075,80.61 169.075,81.1 169.4,81.425 R220.2
NetQ201_5: Q201.5 Q201.6 Q201.7 Q201.8 | length 1.3
  Top Layer w0.2: Q201.7 Q201.6
P_AVDD: C210.2 J203.1 R212.2 U202.2 | length 41.6
  Top Layer w0.2: 146.825,69.525 148.155,69.525 148.64,70.01 U202.2
  Top Layer w0.3: v1(142.675,77.575) 142.675,78.2 143.825,79.35 R212.2 145.275,85.415 J203.1 ; v1(142.925,72.05) 144.275,70.7 144.75,70.7 ; 145.25,70.2 145.925,69.525 146.825,69.525
  Top Layer w0.4: 144.75,71.975 144.75,70.7 145.25,70.2
  Top Layer w0.5: C210.2 144.75,73.75 144.75,71.975
  Bottom Layer w0.3: v1(142.675,77.575) 142.675,72.3 v1(142.925,72.05)
P_CCFG: J203.2 U202.20 | length 26.6
  Top Layer w0.2: U202.20 150.59,78.435 149.35,79.675 148.075,79.675 147.025,80.725 147.025,83.25 147.65,83.875 147.65,85.325 154.025,91.7 156.475,91.7 158.1,93.325 J203.2
P_CHG: R219.2 U202.13 | length 6
  Top Layer w0.2: U202.13 155.14,79.74 156.75,81.35 158.05,81.35 R219.2
P_DSG: R217.2 U202.12 | length 5.6
  Top Layer w0.2: U202.12 156.285,71.585 158.025,73.325 R217.2
P_IN: J202.1 R203.1 R209.1 SW101.1 | length 45
  Top Layer w0.3: J202.1 142.925,54.1 145.75,56.925 R203.1
  Top Layer w0.7: SW101.1 130.455,66.63 133.65,69.825 R209.1 140.9,63.55 143.25,61.2 145.7,61.2 R203.1
P_LD: D202.K U202.14 | length 8.7
  Top Layer w0.2: U202.14 154.49,80.34 155.225,81.075 155.225,85.6 D202.K
P_OCDP: R213.1 U202.17 | length 4.4
  Top Layer w0.2: R213.1 151.775,79.675 152.54,78.91 U202.17
P_PRES: R212.1 U202.22 | length 4.6
  Top Layer w0.2: R212.1 146.275,79.3 146.475,79.1 146.525,79.1 146.675,78.95 148.95,78.95 149.29,78.61 U202.22
P_SRN: C212.2 C214.1 R215.2 U202.11 | length 12.2
  Top Layer w0.3: U202.11 154.565,71.51 154.565,70.71 155,70.275 158.1,70.275 159.05,69.325 161.45,69.325 C212.2 161.488,69.338 163.613,69.338 163.625,69.35 165.2,69.35 R215.2
P_SRP: C212.1 C213.1 R214.2 U202.10 | length 13.7
  Top Layer w0.3: U202.10 153.915,71.51 153.915,70.11 154.55,69.475 157.275,69.475 158.9,67.85 C212.1 161.5,67.825 163.6,67.825 C213.1 R214.2
P_TS: R210.2 R211.1 U202.18 | length 7
  Top Layer w0.2: R210.2 R211.1 149.925,80.95 151.89,78.985 U202.18
P_VC0: C209.2 R208.2 U202.8 | length 10.9
  Top Layer w0.2: C209.2 156.575,65.575 157.275,64.875 157.283,64.875 157.4,64.758 157.4,64.025 R208.2
  Top Layer w0.3: U202.8 152.54,70.26 154.225,68.575 156.35,68.575 156.575,68.35 C209.2
P_VC1: C207.2 C208.1 R207.2 U202.7 | length 8.2
  Top Layer w0.3: U202.7 151.89,69.71 153.45,68.15 153.45,67.275 C208.1 ; C207.2 153.525,64.425 154.35,63.6 R207.2
P_VC2: C206.2 C207.1 R206.2 U202.6 | length 7.6
  Top Layer w0.3: U202.6 151.24,69.16 152.05,68.35 C206.2 ; C207.1 152.025,64.2 152.275,63.95 R206.2
P_VC3: C205.2 C206.1 J205.2 R205.2 U202.5 | length 37.5
  Top Layer w0.3: C205.2 150.55,64.2 150.175,63.825 R205.2 151,62.65 151.225,62.425 151.225,59.5 v1(151.325,59.4) ; C206.1 150.57,67.295 150.57,71.565 U202.5 ; v1(161.3,58.95) 165.75,63.4 172.05,63.4 173.375,62.075 J205.2
  Bottom Layer w0.3: v1(151.325,59.4) 151.775,58.95 v1(161.3,58.95)
P_VC4: C204.2 C205.1 J204.2 J205.1 R204.2 U202.4 | length 41.9
  Top Layer w0.3: C205.1 149.05,64.65 147.9,63.5 147.9,62.675 R204.2 148.775,62.65 149.15,62.275 v1(149.15,59.25) ; C204.2 149.225,67.425 149.225,68.125 149.94,68.84 U202.4 ; v1(159.125,56.775) 164.3,56.775 168.3,60.775 J205.1 173.375,58.235 J204.2
  Bottom Layer w0.3: v1(149.15,59.25) 151.625,56.775 v1(159.125,56.775)
P_VC5: C204.1 J204.1 R203.2 U202.3 | length 41.8
  Top Layer w0.3: v1(146.871,59.217) 146.85,59.238 146.85,62.474 146.674,62.65 R203.2 145.75,63.825 147.575,65.65 C204.1 147.6,67.3 147.6,68.149 147.776,68.325 148.15,68.325 149.29,69.465 U202.3 ; v1(157.425,54.875) 165.875,54.875 167.75,56.75 J204.1 J204.1@170.685,56.6
  Bottom Layer w0.3: v1(146.871,59.217) 151.213,54.875 v1(157.425,54.875)
P_VDD: C211.2 U202.1
P_VTB: R210.1 U202.19 | length 9.1
  Top Layer w0.2: R210.1 148.2,83.55 147.725,83.075 147.725,81.175 148.675,80.225 149.675,80.225 151.24,78.66 U202.19
S_IC_BTST: C104.1 D104.3 U101.16 | length 18.3
  Top Layer w0.2: C104.1 95.793,84.932 97.225,83.5 97.225,82.675 v1(98.325,81.575) 98.319,81.569 98.319,80.846 U101.16
  Bottom Layer w0.2: v1(98.325,81.575) 98.325,82.275 98.9,82.85 D104.3
S_IC_D: D103.K U101.5 | length 11.4
  Top Layer w0.2: D103.K 91.425,72.15 92.1,72.825 v1(94.75,72.825) ; v1(97.4,74.975) 97.825,75.4 98.75,75.4 99.089,75.739 U101.5
  Bottom Layer w0.2: v1(94.75,72.825) 95.825,72.825 97.4,74.4 v1(97.4,74.975)
S_IC_HIDRV: Q102.2 U101.15 | length 6.5
  Top Layer w0.3: Q102.2 99.09,82.26 99.579,81.771 U101.15@99.579,80.132
S_IC_LODRV: Q102.4 U101.13 | length 6.7
  Top Layer w0.3: U101.13 100.589,84.089 101.63,85.13 Q102.4
S_IC_MPPSET: Q101.D R103.1 R104.2 U101.2 | length 13.3
  Top Layer w0.2: v1(95.075,78.2) 95.437,78.562 U101.2
  Bottom Layer w0.2: R104.2 95.025,84.6 Q101.D 94.9,84.375 R103.1 94.9,80.825 93.875,79.8 93.875,78.65 94.325,78.2 v1(95.075,78.2)
S_IC_P: D102.K U101.3 | length 14.3
  Top Layer w0.2: D102.K 88.325,72.525 89.7,73.9 93.275,73.9 95.1,75.725 95.1,77.4 95.762,78.062 U101.3
S_IC_PH: C104.2 L101.1 Q102.1 Q102.5 Q102.6 U101.14 | length 32.7
  Top Layer w0.3: C104.2 95.282,87.218 97.775,84.725 v1(98.075,84.725) 97.82,84.98 Q102.1 ; v1(99.7,84.25) 100.079,83.871 100.079,80.072 U101.14 ; v1(100.7,93.25) 101.225,93.25 101.63,92.845 Q102.5
  Bottom Layer w0.3: v1(98.075,84.725) 98.55,84.25 v1(99.7,84.25) 99.7,84.493 100.7,85.493 v1(100.7,93.25)
S_IC_REGN: C105.2 D104.2 U101.12 | length 6.2
  Top Layer w0.2: U101.12 102.787,79.062 v1(103.525,79.8)
  Bottom Layer w0.2: v1(103.525,79.8) 103.525,81.393 C105.2
  Bottom Layer w0.3: D104.2 101.575,81.9 101.975,81.5 C105.2
S_IC_SRN: C107.2 C108.2 C109.2 C110.2 C201.2 J101.2 L201.1 R107.2 R108.2 SW101.4 SW101.5 SW101.6 TP104.1 U101.9 U201.4 U201.5 | length 91.8
  Top Layer w0.2: U101.9 103.587,77.562 108.525,82.5 R107.2@108.525,84.225 ; R108.2 111.475,75.425 111.725,75.675 C109.2 112.25,77.15 112.25,72.275 112.35,72.175
  Top Layer w0.5: 112.35,67.95 112.35,72.175
  Top Layer w0.7: J101.2 101.95,54.8 108.65,61.5 112.35,61.5 ; R107.2 108.875,84.525 120.1,84.525 121.9,86.325 C201.2 ; 112.35,67.95 112.35,61.5 ; TP104.1 129.075,51.075 127.575,52.575 125.8,52.575 124.015,54.36 SW101.6 SW101.5 SW101.4 115.83,58.02 112.35,61.5
S_IC_SRP: C107.1 L101.2 R107.1 U101.10 | length 14.8
  Top Layer w0.2: U101.10 v1(103.237,78.062) 106.625,81.45 106.625,83.333 106.508,83.45 106.398,83.45 105.623,84.225 R107.1 ; v1(104.15,76.475) 107.082,76.475 C107.1
  Top Layer w0.4: L101.2@108.125,87.304 L101.2@108.175,87.254
  Bottom Layer w0.2: v1(103.237,78.062) 103.237,77.388 v1(104.15,76.475)
S_IC_TS: R112.1 R113.2 TP103.1 U101.4 | length 16.7
  Top Layer w0.2: U101.4 96.812,77.562 95.85,76.6 95.85,73.8 97.475,72.175 R113.2@99.575,72.175 ; R112.1@99.563,70.737 99.55,70.725 99.55,70.7 99.525,70.675 99.525,64.925 TP103.1 ; R112.1@99.563,71 99.563,71.988 R113.2@99.575,72 ; R112.1@99.575,70.825 R112.1@99.575,71
S_IC_VCC: C102.2 R102.1 U101.1 | length 5.1
  Top Layer w0.2: 96.8,79.2 96.938,79.062 U101.1
  Top Layer w0.3: 95.325,79.35 96.65,79.35 96.8,79.2
  Top Layer w0.5: C102.2 93.182,79.35 95.325,79.35
S_IC_VFB: C110.1 R108.1 R109.2 U101.8 | length 20.6
  Top Layer w0.2: v1(98.325,73.25) 98.352,73.25 98.502,73.4 R109.2@99.65,73.4 ; U101.8 100.599,76.292 100.599,75.876 100.9,75.575 103.55,75.575 v1(103.75,75.375) 104.225,74.9 108.9,74.9 109.5,75.5 C110.1 C110.1@109.2,76.55
  Bottom Layer w0.2: v1(98.325,73.25) 98.775,72.8 102.5,72.8 103.75,74.05 v1(103.75,75.375)
S_IC_VREF: C103.2 R112.2 U101.6 U101.7 | length 10.7
  Top Layer w0.2: C103.2@99.5,74.425 C103.2@99.579,74.504 ; 99.579,74.679 99.579,75.35 ; U101.6 99.579,76.552 99.579,75.35 ; 99.85,75.375 100.534,75.375 100.809,75.1 101.725,75.1 102.15,74.675 102.15,71.617 101.383,70.85 R112.2 ; U101.7 100.089,75.86 99.579,75.35
"Solar IN": D101.A R101.2 R103.2 TP101.1 | length 20.3
  Top Layer w0.3: D101.A 87.335,80.185 89.075,81.925 v1(90.8,81.925)
  Top Layer w0.5: TP101.1 72.35,83.4 73.175,82.575
  Top Layer w0.7: 73.175,82.575 75.2,80.55 75.2,79.85 75.975,79.075 R101.2
  Bottom Layer w0.3: v1(90.8,81.925) 93.8,81.925 R103.2
Solar_IN_1_: C101.2 R101.1 | length 3
  Top Layer w0.7: C101.2 78.85,73.2 R101.1
VIN: C106.2 D101.K Q102.7 Q102.8 R102.2 R105.2 R106.2 | length 5.3
  Top Layer w0.2: D101.K 85.415,76.215 D101.K@85.475,76.275
  Top Layer w0.5: D101.K@85.475,76.275 87.975,76.275 88.325,76.625 R102.2
  other v1: 90.3,67.65 89.45,67.675 85.125,74.125 85.9,74.125 85.525,74.65 86.125,74.65 84.975,74.675 91.375,91.125 92.35,91.15 91.3,92.05 92.275,92.2
VSS: C208.2 C209.1 C210.1 C211.1 C213.2 C214.2 J202.6 J203.3 R208.1 R209.2 R211.2 R213.2 R214.1 R216.2 U202.9 U202.16 U202.23 U202.24 | length 37.4
  Top Layer w0.2: v1(148.425,82.025) R211.2 ; U202.23 148.64,76.06 149.9,74.8 153.19,74.8 ; U202.9 153.19,74.8 ; R213.2 153.875,81.275 153.875,79.575 153.19,78.89 U202.16 153.19,74.8
  Top Layer w0.7: R213.2 153.55,81.6 153.55,83.375 152.575,84.35 152.575,87.75 154.1,89.275 157.675,89.275 160.64,92.24 J203.3
  other v1: 155.95,62.75 156.6,62.9 163.6,65.375 166.175,66.975 168.375,66.975 164.55,70.825 162.575,70.875 163.625,71.65 140.925,73.4 142.025,73.55 143.35,74.925 144.725,76.425 146.325,76.45 146.525,77.25 152.75,82.825 154.25,82.825
pads on no net: D104.1 J204.3 J205.3 U202.15 U202.21

## Polygon pours and split planes (outlines as drawn)
VIN on Top Layer "VIN_L01_P040" (solid, pour order 40): 93.1,92.95 93.05,92.9 90.875,92.9 90.875,90.85 90.925,90.8 92.975,90.8 93.05,90.725
VIN on Top Layer "VIN_L01_P039" (solid, pour order 39): 83.975,76.8 83.975,73.9 86.75,73.9 86.825,73.975 86.675,74.125 86.675,76.85
VIN on Top Layer "VIN_L01_P038" (solid, pour order 38): 87.975,68 91.875,68 91.9,67.975 91.9,67.35 88.05,67.35 88,67.3
GND on Top Layer "GND_L01_P035" (solid, pour order 35): 168.4,78.8 168.5,78.7 173.5,78.7 173.5,80.05 173.2,80.35 173.1,80.25 170.2,80.25 169.6,79.65 168.375,79.65
VSS on Top Layer "VSS_L01_P034" (solid, pour order 34): 162.275,71.875 162.275,70.325 162.25,70.3 162.325,70.225 164.85,70.225 164.85,71.75 164.775,71.825
VSS on Top Layer "VSS_L01_P033" (solid, pour order 33): 165.825,67.35 165.375,66.9 162.625,66.9 162.625,65.1 162.875,64.85 166.025,64.85 167.7,66.525 169.05,66.525 169.225,66.7 169.225,68.4 169.1,68.525 165.825,68.525
VSS on Top Layer "VSS_L01_P032" (solid, pour order 32): 148.85,78.2 148.925,78.125 148.925,76.45 147.1,76.45 146.85,76.2 146.85,74.875 146.875,74.85 146.525,74.5 142.925,74.5 142.925,73.725 141.5,72.3 141.525,72.275 141.525,70.825 140.275,70.825 140.225,70.775 140.2,70.8 140.2,74.25 140.225,74.25 142.425,76.45 143.725,76.45 145.45,78.175
P_VDD on Top Layer "P_VDD_L01_P031" (solid, pour order 31): 145.675,74.15 146.75,74.15 146.875,74.025 146.875,72.925 147.375,72.425 148.2,72.425 148.2,70.65 148.175,70.625 145.75,70.625 145.575,70.8 145.575,74.125
VSS on Top Layer "VSS_L01_P030" (solid, pour order 30): 152.375,83.125 152.375,82.55 153.1,81.825 153.1,80.65 153.175,80.575 154.15,80.575 154.15,82.225 154.525,82.6 154.525,83.125
GND on Top Layer "GND_L01_P029" (solid, pour order 29): 110.175,82.775 113.075,82.775 113.425,82.425 113.425,80.175 115.925,80.175 116.575,79.525 116.575,76.275 122.375,76.275 123.225,75.425 123.225,73.425 117.325,73.425 117.25,73.35 114.625,75.975 113.6,75.975 113.6,76.025 113.3,76.325 113.3,79.325 112.925,79.7 110.15,79.7
GND on Top Layer "GND_L01_P028" (solid, pour order 28): 103.625,51.525 115.975,51.525 117.65,49.85 117.65,47.025 103.875,47.025 103.625,47.275
GND on Top Layer "GND_L01_P027" (solid, pour order 27): 69.3,67.975 72.925,71.6 81.625,71.6 81.625,52.475 81.5,52.35 78.15,52.35 77.4,53.1 77.4,60.375 74.75,63.025 68.675,63.025 68.65,63.05 68.65,67.875
AGND on Top Layer "AGND_L01_P026" (solid, pour order 26): 100.275,74.775 100.25,74.75 100.25,71.575 101.4,71.575 101.725,71.9 101.725,74.625 101.575,74.775
S_IC_SRN on Top Layer "S_IC_SRN_L01_P025" (solid, pour order 25): 126.342,52.892 125.65,52.2 125.65,46.7 130.85,46.7 131.05,46.5 131.4,46.85 131.4,52.804
"Solar IN" on Top Layer "SOLAR_IN_L01_P024" (solid, pour order 24): 84,81.925 86.375,81.925 87.05,81.25 87.05,79.35 86.65,78.95 81,78.95 79.9,77.85 77.675,77.85 77.675,80.15 77.75,80.075 83.275,80.075 83.275,81.2
NetQ201_5 on Top Layer "NETQ201_5_L01_P023" (solid, pour order 23): 162.625,80.825 162.625,76.225 ccw(c162.7,76.225) 162.7,76.15 162.725,76.175 167.045,76.175 167.44,76.57 167.44,80.51 167.2,80.75 164.45,80.75 164.35,80.85
S_IC_SRN on Top Layer "S_IC_SRN_L01_P019" (solid, pour order 19): 127.725,79.825 127.725,85.025 128.1,85.4 129.8,85.4 129.8,89.125 129.7,89.225 128.325,89.225 127.675,88.575 127.675,87.45 123.9,87.45 123.5,87.05 123.5,79.825
B_OUT on Top Layer "B_OUT_L01_P018" (solid, pour order 18): 137.175,82.75 138.35,83.925 138.5,83.925 138.5,87.125 138.45,87.175 138.45,90.4 136.75,92.1 136.75,94.75 135.2,94.75 134.9,94.45 134.9,90.7 135.875,90.7 136.1,90.475 136.1,89.95 136.125,89.925 136.125,86.9 135.275,86.05 135.275,82.75
B_SW on Top Layer "B_SW_L01_P015" (solid, pour order 15): 129.125,79.7 128.875,79.95 128.875,80.8 128.675,81 128.675,84.025 128.925,84.275 130.325,84.275 131.225,85.175 131.225,87.075 131.375,87.225 132.65,87.225 132.775,87.1 132.775,86.35 133.5,85.625 133.5,80.075 133.525,80.05 133.175,79.7
B_FB on Top Layer "B_FB_L01_P014" (solid, pour order 14): 132.725,88.3 131.375,88.3 131.275,88.4 131.275,90.85 131.2,90.925 131.2,92 131.475,92.275 132.25,92.275 132.55,92.575 132.55,94.4 132.825,94.675 134.125,94.675 134.4,94.4 134.4,92.2 134.575,92.025 134.575,91.05 134.375,90.85 133.175,90.85 132.725,90.4 132.725,90.35
GND on Top Layer "GND_L01_P013" (solid, pour order 13): 124.025,90.4 124.025,92.65 124.375,93 129.925,93 129.925,92.925 130.95,91.9 130.95,88.35 131.125,88.175 133.25,88.175 133.525,88.45 133.525,90.05 133.75,90.275 135.275,90.275 135.275,90.25 135.475,90.05 135.475,87.4 135.25,87.175 133.725,87.175 133.5,87.4 130.9,87.4 130.075,88.225 130.075,89.6 130.05,89.575 127.85,89.575 127.225,88.95 127.225,88.125 127.2,88.125 127.05,87.975 124.15,87.975 123.775,88.35 123.775,90.15
VSS on Top Layer "VSS_L01_P011" (solid, pour order 11): 155.55,63.275 155.55,62.55 155.625,62.475 156.925,62.475 156.925,63.4 156.875,63.45 156.5,63.45 156.5,64.525 156.325,64.7 155.775,64.7 155.6,64.875 155.6,66.425 155.475,66.55 155.475,67.725 155.25,67.95 154.55,67.95 154.375,67.775 154.375,66.65 154.5,66.525 154.5,65.05 154.8,64.75 154.975,64.75 155.375,64.35 155.375,63.45
P_VC1 on Top Layer "P_VC1_L01_P010" (solid, pour order 10): 153,64.9 153,66.6 152.85,66.75 152.85,67.825 153.025,68 153.925,68 154.05,67.875 154.05,64.9
P_VC4 on Top Layer "P_VC4_L01_P009" (solid, pour order 9): 148.6,64.888 149.575,64.888 149.575,67.863 149.5,67.938 148.55,67.938 148.55,64.913
P_VC2 on Top Layer "P_VC2_L01_P008" (solid, pour order 8): 151.575,64.888 152.55,64.888 152.55,67.863 152.475,67.938 151.525,67.938 151.525,64.913
P_VC3 on Top Layer "P_VC3_L01_P007" (solid, pour order 7): 150.075,64.888 151.05,64.888 151.05,67.863 150.975,67.938 150.025,67.938 150.025,64.913
VIN on Top Layer "VIN_L01_P006" (solid, pour order 6): 93.1,92.95 99.55,92.95 99.55,87.65 99.575,87.625 97.475,87.625 97.475,89.1 95.85,90.725 93.05,90.725
S_IC_VFB on Top Layer "S_IC_VFB_L01_P005" (solid, pour order 5): 108.875,77.275 108.85,77.25 108.85,76.35 110.025,75.175 110.025,74.825 110.825,74.825 110.875,74.775 110.9,74.8 110.9,75.775 110.725,75.775 110.375,76.125 110.125,76.375 110.125,77.3 110.075,77.35 108.925,77.35
S_IC_PH on Top Layer "S_IC_PH_L01_P004" (solid, pour order 4): 105.925,94.825 105.75,94.65 102.95,94.65 101.825,93.525 100.5,93.525 99.8,92.825 99.8,87.75 99.975,87.575 100.025,87.625 101.8,87.625 102.3,88.125 102.3,90.95 103.3,91.95 109.1,91.95 109.1,94.8
S_IC_SRN on Top Layer "S_IC_SRN_L01_P003" (solid, pour order 3): 110,79.175 112.65,79.175 112.8,79.025 112.8,76.35 112.5,76.05 110.975,76.05 110.65,76.375 110.65,77.7 110.125,77.7 110.075,77.75 108.925,77.75 108.8,77.875 107.75,77.875 106.275,77.875 106.175,77.975 106.175,79.452 106.348,79.625 107.35,79.625 107.575,79.85 107.575,82.575 107.35,82.8 107.35,85.125 107.7,85.475 109.4,85.475 109.725,85.15 109.725,79.45
S_IC_SRP on Top Layer "S_IC_SRP_L01_P002" (solid, pour order 2): 105.35,88.85 105.325,88.825 105.325,85.6 104.725,85.6 104.3,85.175 104.35,85.125 104.35,83.25 104.575,83.025 106.5,83.025 106.775,83.3 106.775,85.575 107.2,86 108.925,86 109.225,86.3 109.225,88.85 105.375,88.85
S_IC_VREF on Top Layer "S_IC_VREF_L01_P001" (solid, pour order 1): 100.1,75.225 100.1,74.025 99.925,73.85 99.325,73.85 99.15,74.025 99.15,75.1 99.35,75.3 99.35,75.55 99.395,75.595 99.395,75.845 99.45,75.9 100.225,75.9 100.225,75.35
S_IC_VCC on Top Layer "S_IC_VCC_L01_P000" (solid, pour order 0): 91.825,80.75 92.275,80.3 94.125,80.3 94.225,80.2 94.275,80.2 94.275,78.375 94.225,78.325 89.35,78.325 89.35,80.75 89.375,80.75
GND on Int1 (GND) "GND_L02_P022" (solid, remove dead copper, pour order 22): 67.3,77.325 67.3,87.775 cw(c68.325,87.775) 68.325,88.8 73.1,88.8 ccw(c73.1,91.25) 75.55,91.25 75.55,101.55 cw(c76.9,101.55) 76.9,102.9 177.375,102.9 cw(c177.375,102.475) 177.8,102.475 177.8,46.925 cw(c176.7,46.925) 176.7,45.825 76.825,45.825 cw(c76.825,46.675) 75.975,46.675 75.975,57.71 ccw(c73.435,57.71) 73.435,60.25 67.825,60.25 cw(c67.825,60.6) 67.475,60.6 67.475,69.85
VSS on Int1 (GND) "VSS_L02_P021" (solid, pour order 21): 168,78.35 168,81.889 166.488,83.425 159.5,83.425 159.5,86.375 158,87.875 145.875,87.875 140,82 140,45.575 177.075,45.575 ccw(c177.075,46.6) 178.1,46.6 178.175,46.675 178.175,75.625 175.45,78.35
AGND on Int1 (GND) "AGND_L02_P020" (solid, pour order 20): 97.737,80.013 100.337,80.013 101.4,78.95 101.375,78.925 101.375,77.075 101.41,77.04 101.41,76.34 101.675,76.075 104.725,76.075 105.65,75.15 108.5,75.15 108.5,77.625 108.525,77.65 110.3,77.65 110.5,77.45 110.5,76.225 110.725,76 113.025,76 113.7,75.325 113.7,63.3 112.625,63.3 112.2,62.875 112.15,62.925 98.025,62.925 98,62.9 97.625,63.275 97.625,71.9 94.7,74.825 88.35,74.825 88.35,81.7 88.6,81.95 91.45,81.95 91.45,85.1 91.425,85.125 91.425,87.7 96,87.7 96.05,87.75 96.65,87.15 96.65,81.1
GND on Bottom Layer "GND_L04_P042" (solid, pour order 42): 105.075,79.875 107.25,79.875 107.325,79.95 107.325,82.4 105.15,82.4 105.075,82.325
AGND on Bottom Layer "AGND_L04_P041" (solid, pour order 41): 93.675,87.225 93.675,86.775 93.475,86.575 92.925,86.575 92.425,86.075 92.425,85.175 94.475,85.175 94.55,85.25 94.55,87.3 94.475,87.375 93.725,87.375
VIN on Int2 (PWR) "VIN_L03_P037" (solid, pour order 37): 76.075,89.675 74.675,88.275 68.45,88.275 67.95,87.775 67.95,61.25 74.85,61.25 76.45,59.65 76.45,47 77.125,46.325 175.95,46.325 177.275,47.65 177.275,100.85 175.725,102.4 76.825,102.4 76.825,102.25 76.075,101.5

## Silkscreen, mask and mechanical layers (free items; w line width, h text height)
Top Overlay:
  lines w0.2: 115.65,54.925 120.35,54.95 121.525,56.2 ; 118.925,54.975 118.95,56.275 118.95,56.225 ; 126.55,61.35 128.65,61.35 ccw(c128.65,61.375) 128.675,61.375 129.75,61.95 ; 82.25,61.05 84.6,58.7 109.575,58.7 115.25,64.375 115.25,75.325 117.425,77.5 117.425,94.725 116.3,95.85 83.375,95.85 82.25,94.725 82.25,61.05 ; 121.05,78.675 121.05,93.225 123.425,95.6 124.575,95.6 137.65,95.6 139.85,93.4 139.85,78.725 136.7,75.575 124.15,75.575 121.05,78.675 ; 138.075,63.45 138.075,74.375 144.4,80.7 144.4,86.65 145.85,88.1 166.35,88.1 170,84.45 173.15,84.45 175.3,82.3 175.3,68.325 170.125,63.15 163.8,63.15 158.325,57.675 143.85,57.675 138.075,63.45
  text "+" at 131.8,99.461 h3 r180
  text "-" at 128.675,99.202 h3 r180
  text "12V Boost OUT" at 134.109,98.783 h2
  text "SOLAR BATTERY CHARGER" at 84.142,98.231 h3.5
  text "MPPT Charger" at 82.819,93.06 h1.52
  text "Cells Config." at 154.388,91.808 h1
  text "+" at 69.629,85.325 h1.52
  text "Boost Converter" at 123.944,76.235 h1.52
  text "Solar Cell IN" at 71.37,68.569 h2 r90
  text "-" at 69.379,61.042 h1.52
  text "NTC Pad" at 96.6,61.039 h1.52
  text "Battery Protector" at 144.869,57.71 h1.52
  text "Cells Config." at 168.267,55.488 h1 r90
  text "LED" at 113.63,54.661 h1
  text "-" at 104.3,53.973 h3
  text "+" at 101.175,53.714 h3
  text "+" at 124.975,53.143 h5 r180
  text "-" at 119.7,52.738 h5 r180
  text "Individual Cell Connections" at 141.044,50.265 h1.3
  text "OUTPUT" at 93.706,49.431 h1